# Altium PCB PCB1.PcbDoc
Units mil, origin at the board's own origin, x right, y up, seen from the top; angles counter-clockwise.
Board outline 2180 x 1485 mil, 2 copper layers (Top Layer, Bottom Layer); 30 components, 20 nets, 78 pads, 12 vias.
Unrouted connection lines stored in the file: 2.
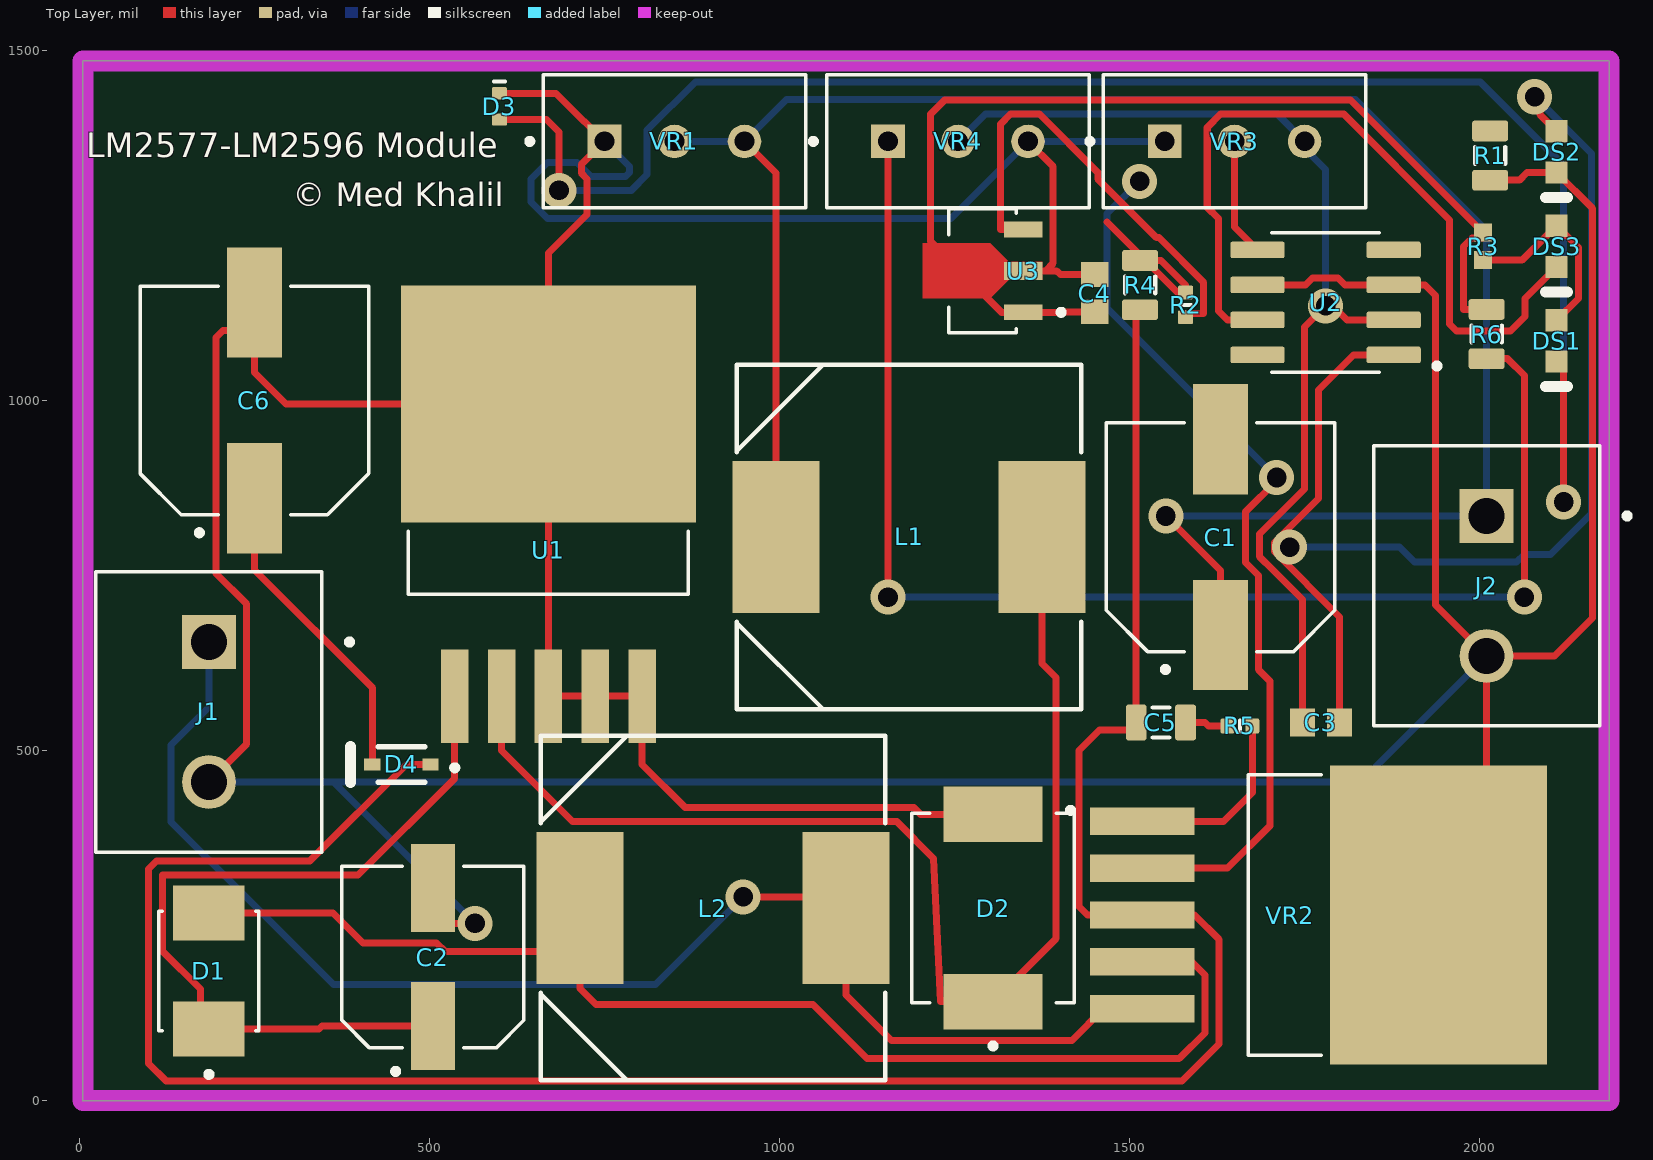
[diagram p0: Top Layer view]
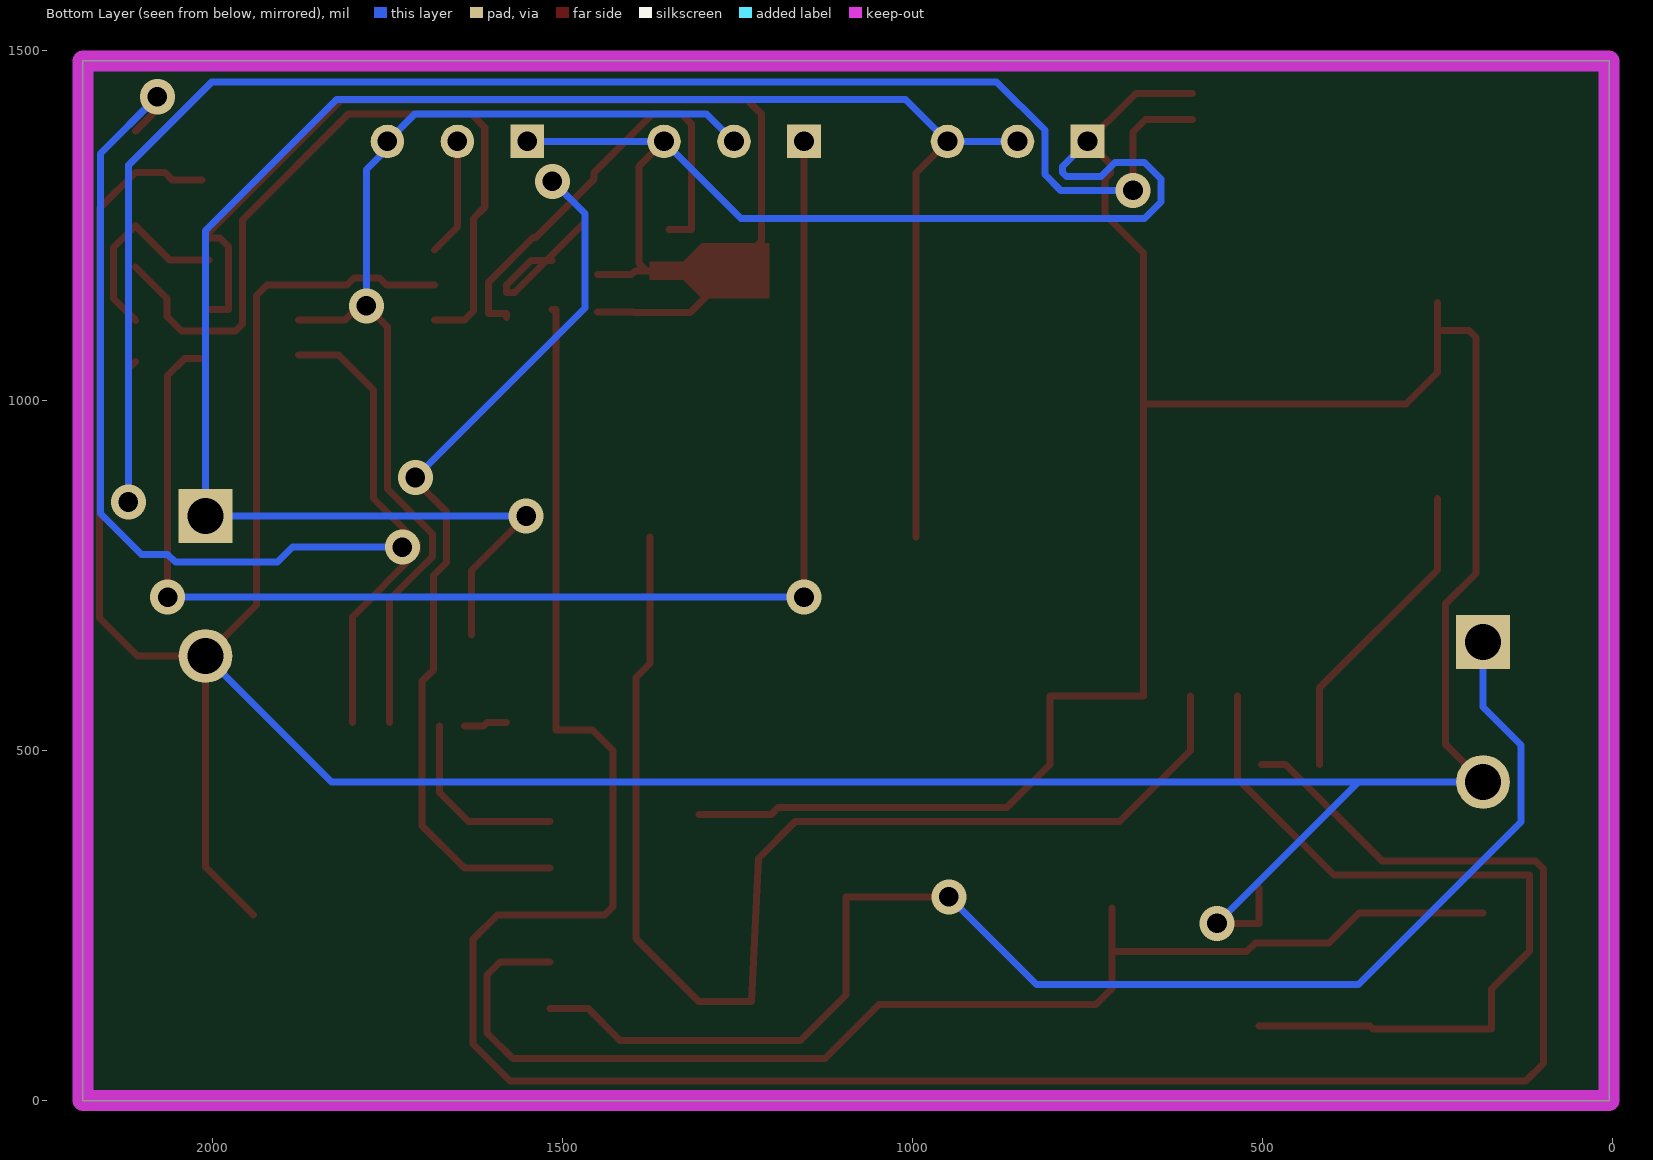
[diagram p1: Bottom Layer view, seen from below]
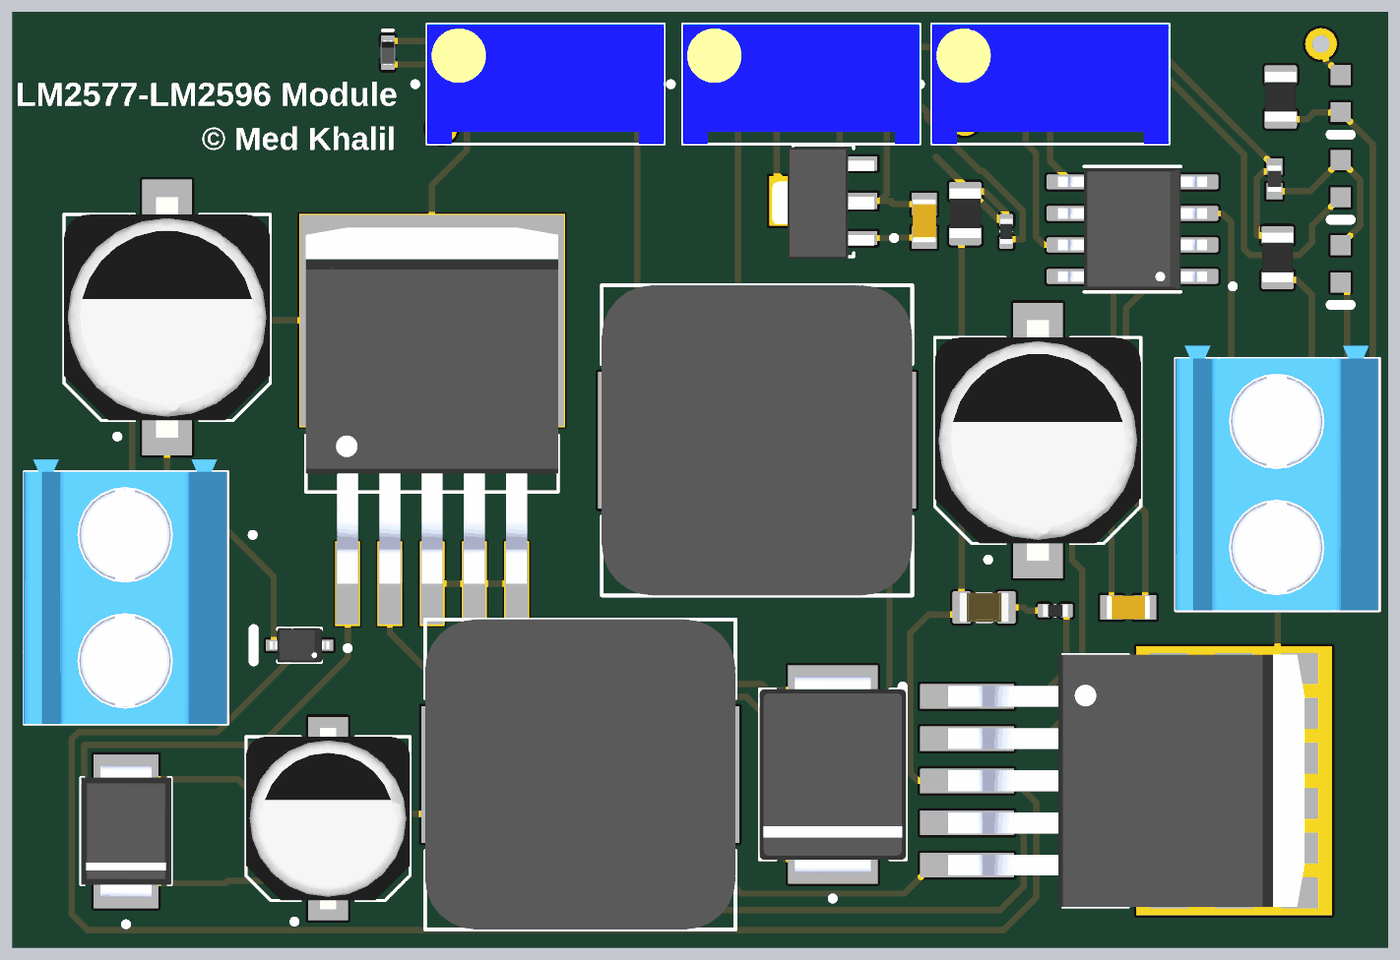
[diagram p2: 3D render of the assembled board from above, using the file's embedded part models]

## Layer stack, top to bottom
Top Solder: solder mask 0.4, Solder Resist, Dk 3.5
Top Layer: signal copper 1.4
Dielectric 1: dielectric 12.6, FR-4, Dk 4.8
Bottom Layer: signal copper 1.4
Bottom Solder: solder mask 0.4, Solder Resist, Dk 3.5

## Board outline
5,0 5,1485 2185,1485 2185,0

## Design rules (kind name [scope] priority, off if disabled: settings)
Clearance [All] p1: gap=10 ignorepadtopadclearanceinfootprint=FALSE
PolygonConnect [All] p1: connectstyle=Relief reliefconductorwidth=10 reliefentries=4 polygonreliefangle="90 Angle" airgapwidth=10
RoutingVias [All] p1: holewidth=28 width=50 viastyle="Through Hole" minholewidth=28 minwidth=50 maxholewidth=28 maxwidth=50
SolderMaskExpansion [All] p1: expansion=4 istentingtop=FALSE
SupplyNets "Schematic Supply Nets_1" [InNet('4')] p1: voltage=0.000
Width [All] p1: maxlimit=10 minlimit=10 preferedwidth=10
30 further rules are at their usual default settings.

## Components (designator, comment, footprint, x,y, rotation, side; value= is the part's Value field where it differs from the comment)
C1 "EEEFK1V221P" CAP_EEEFK1V221P 1630,804.76 r90 top
C2 "EEEFT1V101AP" CAP_EEEFT1V101AP 505,205 r90 top
C3 "Capacitor 10 pF +/- 0.25 pF 50 V 0603" CAPC1608X87X35NL15T15 1773.43,540 r0 top value=10pF
C4 "Capacitor 10 pF +/- 0.25 pF 50 V 0603" CAPC1608X87X35NL15T15 1450,1153.25 r270 top value=10pF
C5 "Capacitor 4.7µF +/-40% 25V 0805" CAPC0805(2012)145_L 1545,540 r0 top value=4.7µF
C6 "EEEFK1V221P" CAP_EEEFK1V221P 250,1000 r90 top
D1 "SK54B" DIO_SK54B 185,185 r90 top
D2 "SS34" DIO_SS34 1305,275 r90 top
D3 "1SS400CSFH" ROHM-VMN2-2_V 600,1420 r270 top
D4 "1N4148WS-7-F" DIOD-SOD323-2-A_V 460,480 r180 top
DS1 "19-217-G7C-AN1P2-3T" EVRL-0603-2_V 2110,1085 r270 top
DS2 "19-217/BHC-ZL1M2RY/3T" EVRL-0603-2_V 2110,1355 r270 top
DS3 "19-217/R6C-AL1M2VY/3T" EVRL-0603-2_V 2110,1220 r270 top
J1 "TB006-508-02BE" CUI_TB006-508-02BE 185,655 r270 top
J2 "TB006-508-02BE" CUI_TB006-508-02BE 2010,835 r270 top
L1 "DR125-330-R" INDM125125X600N 1185,805 r0 top
L2 "DR125-330-R" INDM125125X600N 905,275 r0 top
R1 "Resistor 470R +/-5% 0805 125 mW" RESC0805(2012)_L 2015,1349.96 r90 top value=470
R2 "10KR2F" RESC0402(1005)_L 1580,1136.52 r270 top value=10k
R3 "Resistor 1k +/-1% 0402 100 mW" RESC1005X40X25ML05T05 2005,1220 r270 top value=1k
R4 "Resistor 470R +/-5% 0805 125 mW" RESC0805(2012)_L 1515,1165 r90 top value=470
R5 "Resistor 2K2  +/-5 % 0402 63 mW" RESC0402(1005)_L 1657.72,535 r0 top value=2.2k
R6 "Resistor 470R +/-5% 0805 125 mW" RESC0805(2012)_L 2010,1095 r90 top value=470
U1 "LM2596S-3.3/NOPB" VREG_LM2596S-3.3/NOPB 670,995 r90 top
U2 "LM358D" SOIC127P599X175-8N 1780,1140 r180 top
U3 "L78L05ABUTR" VREG_L78L05ABUTR 1290,1185 r180 top
VR1 "3296W1103LF" TRIM_3296W1103LF 850,1370 r0 top
VR2 "LM2577S-ADJ" TO170P1524X483-6N 1770,265 r0 top
VR3 "3296W1103LF" TRIM_3296W1103LF 1650,1370 r0 top
VR4 "3296W1103LF" TRIM_3296W1103LF 1255,1370 r0 top

## Footprints (in the part's own frame and the unit in brackets; to place one, negate y for a bottom-side part, rotate by r counter-clockwise, add the part's x,y. Pads: shape width x height; smd on the part's side, far side on the other; paste and mask are expansions set on the pad)
CAP_EEEFK1V221P [mm]
  rect 4x2 smd: 1(-3.55,0) 2(3.55,0)
  silkscreen extent -4.9,-4.15 4.15,4.15, body extent -4.85,-4.15 4.85,4.15, height 10.2
CAP_EEEFT1V101AP [mm]
  rect 3.2x1.6 smd: 1(-2.5,0) 2(2.5,0)
  silkscreen extent -4.25,-3.3 3.3,3.3, body extent -3.65,-3.3 3.65,3.3, height 5.8
CAPC0805(2012)145_L [mm] "Chip Capacitor, Body 2.0x1.2mm, Height 1.45mm, IPC High Density"
  rrect25% 0.76x1.3 smd: 1(-0.9,0) 2(0.89,0)
  silkscreen extent -0.3,-0.55 0.3,0.55, body extent -1,-0.6 1,0.6, height 1.45
CAPC1608X87X35NL15T15 [mm] "Chip Capacitor, 2-Leads, Body 1.75x0.95mm, IPC Medium Density"
  rect 0.9x1 smd: 1(-0.675,0) 2(0.675,0)
  body extent -0.87,-0.48 0.87,0.48, height 0.87
CUI_TB006-508-02BE [mm]
  rect 1.95x1.95 / inner round 1.95 / far side rect 1.95x1.95 hole 1.3: 1(0,0)
  round 1.95 hole 1.3: 2(5.08,0)
  silkscreen extent -2.54,-4.1 7.62,5.2, body extent -3.04,-4.14 7.62,4.06, height 10
DIO_SK54B [mm]
  rect 2x2.6 smd: A(2.1,0) C(-2.1,0)
  silkscreen extent -3.85,-1.81 2.16,1.81, body extent -2.68,-1.81 2.68,1.81, height 2.65
DIO_SS34 [mm]
  rect 2x3.6 smd: A(3.4,0) C(-3.4,0)
  silkscreen extent -5.1,-2.95 3.44,2.95, body extent -3.98,-2.95 3.98,2.95, height 2.65
DIOD-SOD323-2-A_V [mm] "SOD-323, 2-Leads, Body 1.7x1.3mm, Lead Span 2.5mm"
  rect 0.59x0.45 smd: 1(-1.055,0) 2(1.055,0)
  silkscreen extent -0.85,-0.65 1.85,0.65, body extent -1.24,-0.7 1.24,0.7, height 1.2
EVRL-0603-2_V [mm] "SMD, 2-Leads, Body 1.6x0.8mm"
  rect 0.8x0.8 smd: 1(-0.75,0) 2(0.75,0)
  silkscreen extent 1.65,-0.4 1.65,0.4, body extent -0.8,-0.4 0.8,0.4, height 0.5
INDM125125X600N [mil]
  rect 124x217 smd: 1(-190,0) 2(190,0)
  silkscreen extent -246,-246 246,246, body extent -246,-246 246,246, height 236
RESC0402(1005)_L [mm] "Chip Resistor, Body 1.0x0.5mm, IPC High Density"
  rrect25% 0.5x0.55 smd: 1(-0.45,0) 2(0.45,0)
  silkscreen extent 0,-0.2 0,0.2, body extent -0.5,-0.25 0.5,0.25, height 0.3
RESC0805(2012)_L [mm] "Chip Resistor, Body 2.0x1.3mm, IPC High Density"
  rrect25% 0.76x1.3 smd: 1(-0.9,0) 2(0.89,0)
  silkscreen extent -0.3,-0.55 0.3,0.55, body extent -1,-0.62 1,0.63, height 0.6
RESC1005X40X25ML05T05 [mm] "Chip Resistor, 2-Leads, Body 1.05x0.55mm, IPC Low Density"
  rect 0.65x0.65 smd: 1(-0.5,0) 2(0.5,0)
  body extent -0.53,-0.28 0.53,0.28, height 0.4
ROHM-VMN2-2_V [mm] "VMN2, 2-Leads, Body 0.9x0.6mm, Pitch 0.95mm"
  rrect25% 0.45x0.55 smd: 1(-0.475,0) 2(0.475,0)
  silkscreen extent -0.9,-0.2 -0.9,0.2, body extent -0.5,-0.3 0.5,0.3, height 0.37
SOIC127P599X175-8N [mm]
  rrect25% 1.97x0.6 smd: 1(-2.47,1.905) 2(-2.47,0.635) 3(-2.47,-0.635) 4(-2.47,-1.905) 5(2.47,-1.905) 6(2.47,-0.635) 7(2.47,0.635) 8(2.47,1.905)
  silkscreen extent -4.14,-2.53 1.95,2.53, body extent -3,-2.45 3,2.45, height 1.75
TO170P1524X483-6N [mm]
  rect 3.79x0.99 smd: 1(-6.4,3.4) 2(-6.4,1.7) 3(-6.4,0) 4(-6.4,-1.7) 5(-6.4,-3.4)
  rect 7.88x10.84 smd paste-6: 6(4.35,0)
  silkscreen extent -9.1,-5.08 0.09,5.08, body extent -7.18,-5.08 7.18,5.08, height 4.65
TRIM_3296W1103LF [mm]
  rect 1.218x1.218 hole 0.71: 1(-2.54,0)
  round 1.218 hole 0.71: 2(0,0) 3(2.54,0)
  silkscreen extent -5.35,-2.41 4.76,2.42, body extent -4.76,-2.41 4.76,2.42, height 11.18
VREG_L78L05ABUTR [mm]
  rect 1.4x0.57 smd: 1(-1.475,1.5) 3(-1.475,-1.5)
  rect 1.4x0.65 smd paste-2 mask+0: 2(-1.475,0)
  Top Layer region: 2.175,-1 -0.275,-1 -0.95,-0.325 -2.175,-0.325 -2.175,0.325 -0.95,0.325 -0.275,1 2.175,1
  silkscreen extent -2.95,-2.25 1.22,2.25, body extent -2.05,-2.16 2.05,2.34, height 1.6
VREG_LM2596S-3.3/NOPB [mm]
  rect 3.4x1 smd paste-0.05 mask+0.07: 1(-10.6,3.4) 2(-10.6,1.7) 3(-10.6,0) 4(-10.6,-1.7) 5(-10.6,-3.4)
  rect 8.6x10.7 smd paste-0.05 mask+0.07: 6(0,0)
  silkscreen extent -13.3,-5.08 -4.62,5.08, body extent -10.6,-5.08 3.75,5.08, height 4.65

## Part data
C1 C6: "220ÂµF 35V Aluminum Electrolytic Capacitors Radial, Can - SMD 2000 Hrs @ 105Â°C", Package="RADIAL-2 Panasonic", Check_prices=https://www.snapeda.com/parts/EEEFK1V221P/Panasonic/view-part/?ref=eda, MF=Panasonic, MP=EEEFK1V221P, SnapEDA_Link=https://www.snapeda.com/parts/EEEFK1V221P/Panasonic/view-part/?ref=snap
C2: "100ÂµF 35V Aluminum Electrolytic Capacitors Radial, Can - SMD 260mOhm @ 100kHz 2000 Hrs @ 105Â°C", Package="RADIAL-2 Panasonic", Check_prices=https://www.snapeda.com/parts/EEE-FT1V101AP/Panasonic+Electronic+Components/view-part/?ref=eda, MF=Panasonic, MP=EEE-FT1V101AP, SnapEDA_Link=https://www.snapeda.com/parts/EEE-FT1V101AP/Panasonic+Electronic+Components/view-part/?ref=snap
C3 C4: library part CMP-001-00012-6, "Chip Capacitor, 10 pF, +/- 0.25 pF, 50 V, 0603 (1608 Metric)", Capacitor Type=Ceramic, Case/Package=0603, Max Operating Temperature=125°C, Min Operating Temperature=-55°C, Tolerance=0.25%, Voltage Rating=50V, Mounting Technology=SM, Pins=2, RoHS Compliant=True
C5: library part CMP-001-00080-4, "Chip Capacitor, 4.7µF +/-40%, 25V, 0805, Thickness 1.45 mm", Case/Package=0805, Max Operating Temperature=85°C, Min Operating Temperature=-55°C, Tolerance=20%, Voltage Rating=25V, Mounting Technology=SMT, Pins=2
D1: "5A, 40V, Schottky Rectifier", Package="SMB-2 Taiwan Semiconductor", Check_prices=https://www.snapeda.com/parts/SK54B/Taiwan+Semiconductor/view-part/?ref=eda, MF="Taiwan Semiconductor", MP=SK54B, SnapEDA_Link=https://www.snapeda.com/parts/SK54B/Taiwan+Semiconductor/view-part/?ref=snap
D2: "3A, 40V, Schottky Rectifier", Package="DO-214AB-2 Taiwan Semiconductor", Check_prices=https://www.snapeda.com/parts/SS34/Taiwan+Semiconductor/view-part/?ref=eda, MF="Taiwan Semiconductor", MP=SS34, SnapEDA_Link=https://www.snapeda.com/parts/SS34/Taiwan+Semiconductor/view-part/?ref=snap
D3: library part CMP-004-00022-3, "Switching Diode (High Speed Switching), 80 V, 100 mA, 2-Pin SOD-923, RoHS, Tape and Reel", Mounting Technology=SMT, Pins=2
D4: library part CMP-004-00002-2, "Fast Switching Diode, 75 V, 0.3 A, -65 to 150 degC, 2-Pin SOD323, RoHS, Tape and Reel", Case/Package=SOD, Forward Current=300mA, Forward Voltage=1.25V, Manufacturer="Diodes Inc", Max Operating Temperature=150°C, Max Surge Current=2A, Min Operating Temperature=-65°C, Package Description="2-Pin Small Outline Diode, Body 1.7 x 1.3 mm", Package Quantity=3000, Package Reference=SOD323-2, Peak Reverse Current=1uA, Datasheet URL=http://www.diodes.com/datasheets/ds30097.pdf, Datasheet Version="Rev. 25-2, 03/2016", Elements=1, Manufacturer URL=http://www.diodes.com/, Mounting Technology=SM, Packaging=TapeandReel, Pins=2, Recovery Time=4ns, RoHS Compliant=True
DS1: library part CMP-007-00002-2, "Chip LED, Yellow-Green, 5 V, 25 mA, -40 to 85 degC, 2-Pin SMD (0603), RoHS, Tape and Reel", Case/Package=0603, Colour=Green, Forward Voltage=2V, Manufacturer="Everlight Electronics", Package Description="2-Pin Surface Mount Device, Body 1.6 x 0.8 mm", Datasheet URL=https://datasheet.ciiva.com/48679/19-217-g7c-an1p2-3t-48679179.pdf, Datasheet Version="Rev. 1, 04/2006", Lens Style=Clear, Manufacturer URL=http://www.everlight.com/, Mounting Technology=SM, Package Reference=0603, Pins=2, RoHS Compliant=True, Viewing Angle=120degrees
DS2: library part CMP-007-00003-2, "Chip LED, Blue, 5 V, 25 mA, -40 to 85 degC, 2-Pin SMD (0603), RoHS, Tape and Reel", Case/Package=0603, Colour=Blue, Forward Current=25mA, Forward Voltage=3V, Manufacturer="Everlight Electronics", Max Operating Temperature=85°C, Min Operating Temperature=-40°C, Package Description="2-Pin Surface Mount Device, Body 1.6 x 0.8 mm", Datasheet URL=https://datasheet.ciiva.com/26901/getdatasheetpartid-420616-26901324.pdf, Datasheet Version="Rev. 1.0, 03/2003", Lens Style=Diffused, Luminous Intensity=28.5mcd, Manufacturer URL=http://www.everlight.com/, Mounting Technology=SM, Package Reference=0603, Packaging=TapeandReel, Pins=2, RoHS Compliant=True, Viewing Angle=120degrees
DS3: library part CMP-007-00004-2, "Chip LED, Red, 5 V, 25 mA, -40 to 85 degC, 2-Pin SMD (0603), RoHS, Tape and Reel", Case/Package=0603, Colour=Red, Forward Voltage=2.2V, Manufacturer="Everlight Electronics", Package Description="2-Pin Surface Mount Device, Body 1.6 x 0.8 mm", Datasheet URL=https://datasheet.ciiva.com/4688/el-19-217-r6c-al1m2vy-3tpdf-187026-4688713.pdf, Datasheet Version="Rev. 1, 01/2005", Lens Style=Clear, Manufacturer URL=http://www.everlight.com/, Mounting Technology=SM, Package Reference=0603, RoHS Compliant=False
J1 J2: "2~24 Poles, Screw Type, Horizontal, 5.08 Pitch, 26~14 (AWG), Terminal Block Connector", Package=None, Check_prices=https://www.snapeda.com/parts/TB006-508-02BE/Same+Sky/view-part/?ref=eda, MF="Same Sky", MP=TB006-508-02BE, SnapEDA_Link=https://www.snapeda.com/parts/TB006-508-02BE/Same+Sky/view-part/?ref=snap
L1 L2: "Inductor, Wirewound, Shielded, 33uH, 50.5mOhm, 3.28A, Surface Mount, DR Series", Package="Non Standard Coiltronics / Eaton", Check_prices=https://www.snapeda.com/parts/DR125-330-R/Eaton/view-part/?ref=eda, MF=Eaton, MP=DR125-330-R, SnapEDA_Link=https://www.snapeda.com/parts/DR125-330-R/Eaton/view-part/?ref=snap
R1 R4 R6: library part CMP-009-00122-3, "Chip Resistor, 470 Ohms, +/-5%, 125 mW, -55 to 155 degC, 0805", Case/Package=0805, Max Operating Temperature=155°C, Min Operating Temperature=-55°C, Power=125mW, Tolerance=5%, Pins=2
R2: library part CMP-009-00066-2, "10K 0.063W 1% 0402 (1005 Metric)  SMD", Case/Package=0402, Power=63mW, Tolerance=1%, Mounting Technology=SMT, Pins=2
R3: library part CMP-009-00009-5, "Chip Resistor, 1 KOhm, +/- 1%, 0.1 W, -55 to 155 degC, 0402 (1005 Metric)", Case/Package=0402, Max Operating Temperature=155°C, Min Operating Temperature=-55°C, Power=100mW, Tolerance=1%, Voltage Rating=50V, Mounting Technology=SM, Pins=2, RoHS Compliant=True
R5: library part CMP-009-00166-3, "Chip Resistor, 2,2 kOhms, +/-5 %, 63 mW, -55 to 155 degC, 0402", Case/Package=0402, Max Operating Temperature=155°C, Min Operating Temperature=-55°C, Power=63mW, Tolerance=5%, Pins=2
U1: "SIMPLE SWITCHERÂ® 4.5V to 40V, 3A Low Component Count Step-Down Regulator 5-DDPAK/TO-263", Package="TO-263-5 Texas Instruments", Check_prices=https://www.snapeda.com/parts/LM2596S-3.3/Texas+Instruments/view-part/?ref=eda, MF="Texas Instruments", MP=LM2596S-3.3, SnapEDA_Link=https://www.snapeda.com/parts/LM2596S-3.3/Texas+Instruments/view-part/?ref=snap
U2: "Op Amp Dual Low Power Amplifier Â±15V/30V 8-Pin SO N Tube", Package=None, Check_prices=https://www.snapeda.com/parts/LM358D/STMicroelectronics/view-part/?ref=eda, MF=STMicroelectronics, MP=LM358D, SnapEDA_Link=https://www.snapeda.com/parts/LM358D/STMicroelectronics/view-part/?ref=snap
U3: "Linear Voltage Regulator IC Positive Fixed 1 Output 100mA SOT-89-3", Package="SOT-89-3 STMicroelectronics", Check_prices=https://www.snapeda.com/parts/L78L05ABUTR/STMicroelectronics/view-part/?ref=eda, MF=STMicroelectronics, MP=L78L05ABUTR, SnapEDA_Link=https://www.snapeda.com/parts/L78L05ABUTR/STMicroelectronics/view-part/?ref=snap
VR1 VR3 VR4: "Trimmer, Potentiometer 10kohm 25turn Thd", Package=None, Availability=Unavailable, Check_prices=https://www.snapeda.com/parts/3296W1103LF/Bourns/view-part/2487625/?ref=eda, MF=Bourns, MP=3296W1103LF, Price=None, SnapEDA_Link=https://www.snapeda.com/parts/3296W1103LF/Bourns/view-part/2487625/?ref=snap
VR2: "SIMPLE SWITCHERÂ® 3.5V to 40V, 3A Low Component Count Step-Up Regulator 5-DDPAK/TO-263 -40 to 125", Package="TO-263-5 Texas Instruments", Check_prices=https://www.snapeda.com/parts/LM2577S-ADJ/Texas+Instruments/view-part/?ref=eda, MF="Texas Instruments", MP=LM2577S-ADJ, SnapEDA_Link=https://www.snapeda.com/parts/LM2577S-ADJ/Texas+Instruments/view-part/?ref=snap

## Via types
v1: diameter 50, hole 28, Top Layer to Bottom Layer, 12 vias

## Nets (pads, with @x,y where several pads share a name; then routed paths per layer and width w, separated by ;. In a path a pad name is that pad's centre, name@x,y a point inside that pad or via, vN(x,y) a via of type N, cw(c..) or ccw(c..) an arc to the next point about the centre after c; other vN are vias at no path point)
4: C1.2 C2.2 C4.1 C6.2 D2.A D3.1 DS2.2 J1.2 J2.2 R1.1 U1.3 U1.4 U1.5 U1.6 U2.3 U2.6 U3.2 VR1.1 VR2.6 VR3.1 VR4.3 | length 9006.7
  Top Layer w10: J1.2 239,509 239,709 195,753 195,1090 205,1100 C6.2@250,1100 ; C6.2 C6.2@250,1100 ; C2.2 505,253 v1(565,253) ; D3.1 680.76,1438.7 720.76,1398.7 721.3,1398.7 VR1.1 716.88,1336.88 716.88,1324.69 725,1316.57 725,1265.43 670,1210.43 U1.6 ; D2.A 1201.64,408.86 1192,418.5 865.36,418.5 803.86,480 U1.5 U1.4 U1.3 U1.6 ; U3.2 1380,1185 ; VR4.3 1391,1334 1391,1196 1380,1185 ; C4.1 1401.17,1179.83 1396,1185 1380,1185 ; U2.6 1751.55,1165 1761.55,1175 1797.51,1175 1807.51,1165 U2.3 1922,1165 1937,1150 1937,708 J2.2 ; VR2.6 2010,333.74 J2.2 ; R1.1 2057,1314.53 2067.94,1325.47 DS2.2 2161,1274.47 2161,689 2107,635 J2.2 ; C6.2@250,1100 250,1040 295,995 U1.6
  Bottom Layer w10: J1.2 363,455 ; v1(565,253) 363,455 ; VR1.1 785.86,1334.14 785.86,1325.86 780,1320 730.83,1320 710.83,1340 668.43,1340 645,1316.57 645,1283.43 668.43,1260 1245,1260 VR4.3 VR3.1 ; J2.2 1830,455 363,455
D1: C3.2 DS2.1 U2.1 | length 1851.4
  Top Layer w10: v1(1728.73,790.45) 1721.07,798.1 1708.47,798.1 v1@1708.28,798.28 ; C3.2 1800,690.89 1706.93,783.96 1706.93,796.93 v1@1708.28,798.28 ; U2.1 1820,1065 1770,1015 1770,860 v1@1708.28,798.28 ; v1(2078.78,1433.78) 2086.44,1426.13 2086.44,1408.09 DS2.1
  Bottom Layer w10: v1(1728.73,790.45) 1885.55,790.45 1907,769 2053,769 2064,780 2101.57,780 2160,838.43 2160,1352.57 v1(2078.78,1433.78)
D2: C3.1 U2.2 VR3.3 VR4.2 | length 1539.5
  Top Layer w10: C3.1 1746.85,715.76 1704.37,758.24 1685.86,776.75 1685.86,809.29 1750,873.43 1750,1105 v1(1780,1135) 1790.82,1135 1810.82,1115 U2.2
  Bottom Layer w10: VR4.2 1294,1409 1711,1409 VR3.3 1750,1359.73 1780,1329.73 v1(1780,1135)
D5: U2.5 VR3.2 | length 168.6
  Top Layer w10: VR3.2 1650,1247.76 U2.5
D7: DS3.2 U2.7 | length 1105.1
  Top Layer w10: U2.7 1640,1115 1627,1128 1627,1260 1611,1276 1611,1390 1629.98,1408.98 1806.02,1408.98 1957,1258 1957,1109 1967,1099 2044,1099 2065,1120 2065,1145.47 DS3.2
NetC2_1: C2.1 D1.C U1.1 | length 1168.1
  Top Layer w10: C2.1 346.25,106.57 342,102.32 D1.C 173,102.32 173,159.12 118.82,213.31 118.82,322.05 398.19,322.05 536.14,460 U1.1
NetC4_2: C4.2 R3.1 R6.2 U3.1 | length 1497.6
  Top Layer w10: C4.2 1398.73,1126.68 1398,1125.94 U3.1 1317,1125.94 1216,1226.94 1216,1409 1236,1429 1815.69,1429 R3.1 2005,1231.89 1988.89,1231.89 1977,1220 1977,1130.04 R6.2
NetC5_1: C5.1 D4.1 R4.1 VR2.3 | length 3595.3
  Top Layer w10: D4.1 467,480 329.05,342.05 110,342.05 98.82,330.87 98.82,53.18 124,28 1575,28 1627.64,80.64 1627.64,230.36 1593,265 VR2.3 1440,265 1428,277 1428,500 1457,529 1509.57,529 C5.1 1509.57,831.43 1509,832 1509,1129.57 R4.1
NetC5_2: C5.2 R5.1 | length 62
  Top Layer w10: C5.2 1608.07,540 1613.07,535 R5.1
NetC6_1: C6.1 D4.2 | length 450.8
  Top Layer w10: C6.1 250,758 419,589 419,480 D4.2
NetD1_A: D1.A L2.1 VR2.4 | length 1797.2
  Top Layer w10: D1.A 362.32,267.68 405,225 510.26,225 522.66,212.6 L2.1@715,212.6 ; L2.1 L2.1@715,212.6 ; VR2.4 1589,198.07 1607.64,179.43 1607.64,96.65 1570.99,60 1125,60 1048,137 738,137 715,160 L2.1@715,212.6
NetD2_C: D2.C L1.2 U1.2 | length 1747.9
  Top Layer w10: U1.2 603.07,500 704.57,398.5 1167.5,398.5 1220,346 1230,141.14 D2.C 1395,231.14 1395,604 1375,624 L1.2
NetD3_2: D3.2 DS1.2 | length 2447.2
  Top Layer w10: D3.2 667.27,1401.3 685,1383.57 v1(685,1300) ; DS1.2 2120,1045.47 v1(2120,855)
  Bottom Layer w10: v1(685,1300) 788.28,1300 811.02,1322.74 811.02,1386.14 879.88,1455 2001,1455 2120,1336 v1(2120,855)
NetDS1_1: DS1.1 DS3.1 R3.2 | length 286.1
  Top Layer w10: R3.2 2060.79,1200.31 DS3.1 2141,1218.53 2141,1145.53 DS1.1
NetR2_1: R2.1 R4.2 VR2.2 | length 1524
  Top Layer w10: 1468,1255 R4.2@1522.96,1200.04 ; R4.2 R4.2@1522.96,1200.04 ; VR2.2 1640,331.93 1700.28,392.21 1700.28,599.43 1684.37,615.33 1684.37,749.95 1665.86,768.47 1665.86,841.06 1710,885.2 v1(1710,890) ; R4.2@1522.96,1200.04 1544.96,1200.04 1580,1165 R2.1 1568.76,1154.24 R4.2@1522.96,1200.04
  Bottom Layer w10: v1(1514.3,1313.04) 1468,1266.74 1468,1132 v1(1710,890)
NetR2_2: R2.2 U3.3 | length 659.7
  Top Layer w10: U3.3 1316,1244.06 1316,1395 1330,1409 1371.12,1409 1454.66,1325.46 1454.66,1316.12 1538.2,1232.58 1542.1,1232.58 1606,1168.68 1606,1124 1580,1124 R2.2
NetR5_2: R5.2 VR2.1 | length 269.4
  Top Layer w10: VR2.1 1634.29,398.86 1675.43,440 R5.2
NetR6_1: R6.1 VR4.1 | length 1940.5
  Top Layer w10: v1(1155,719) VR4.1 ; R6.1 2040,1059.57 2064,1035.57 v1(2064,719)
  Bottom Layer w10: v1(1155,719) v1(2064,719)
"VIN +": J1.1 L2.2 VR2.5 | length 1999.9
  Top Layer w10: v1(948,291) 1095,291 L2.2 1095,151 1160,86 1417.86,86 1463,131.14 VR2.5
  Bottom Layer w10: J1.1 185,562 131,508 131,398 363,166 823,166 v1(948,291)
"VOUT +": C1.1 J2.1 L1.1 VR1.2 VR1.3 | length 2914.3
  Top Layer w10: VR1.3 995,1325 L1.1 ; v1(1552,835) 1630,757 C1.1
  Bottom Layer w10: VR1.2 VR1.3 1010,1430 1823,1430 2010,1243 J2.1 v1(1552,835)
pads on no net: R1.2 U2.4 U2.8

## Keep-outs
Keep-Out Layer:
  the board outline again, w30

## Silkscreen, mask and mechanical layers (free items; w line width, h text height)
Top Overlay:
  text "LM2577-LM2596 Module" at 10,1335.72 h60
  text "© Med Khalil" at 305,1265.91 h58